# Altium PCB Power_Pcb.PcbDoc
Units mil, origin at the board's own origin, x right, y up, seen from the top; angles counter-clockwise.
Board outline 1870 x 3940 mil, 2 copper layers (Top Layer, Bottom Layer); 15 components, 11 nets, 49 pads, 0 vias.
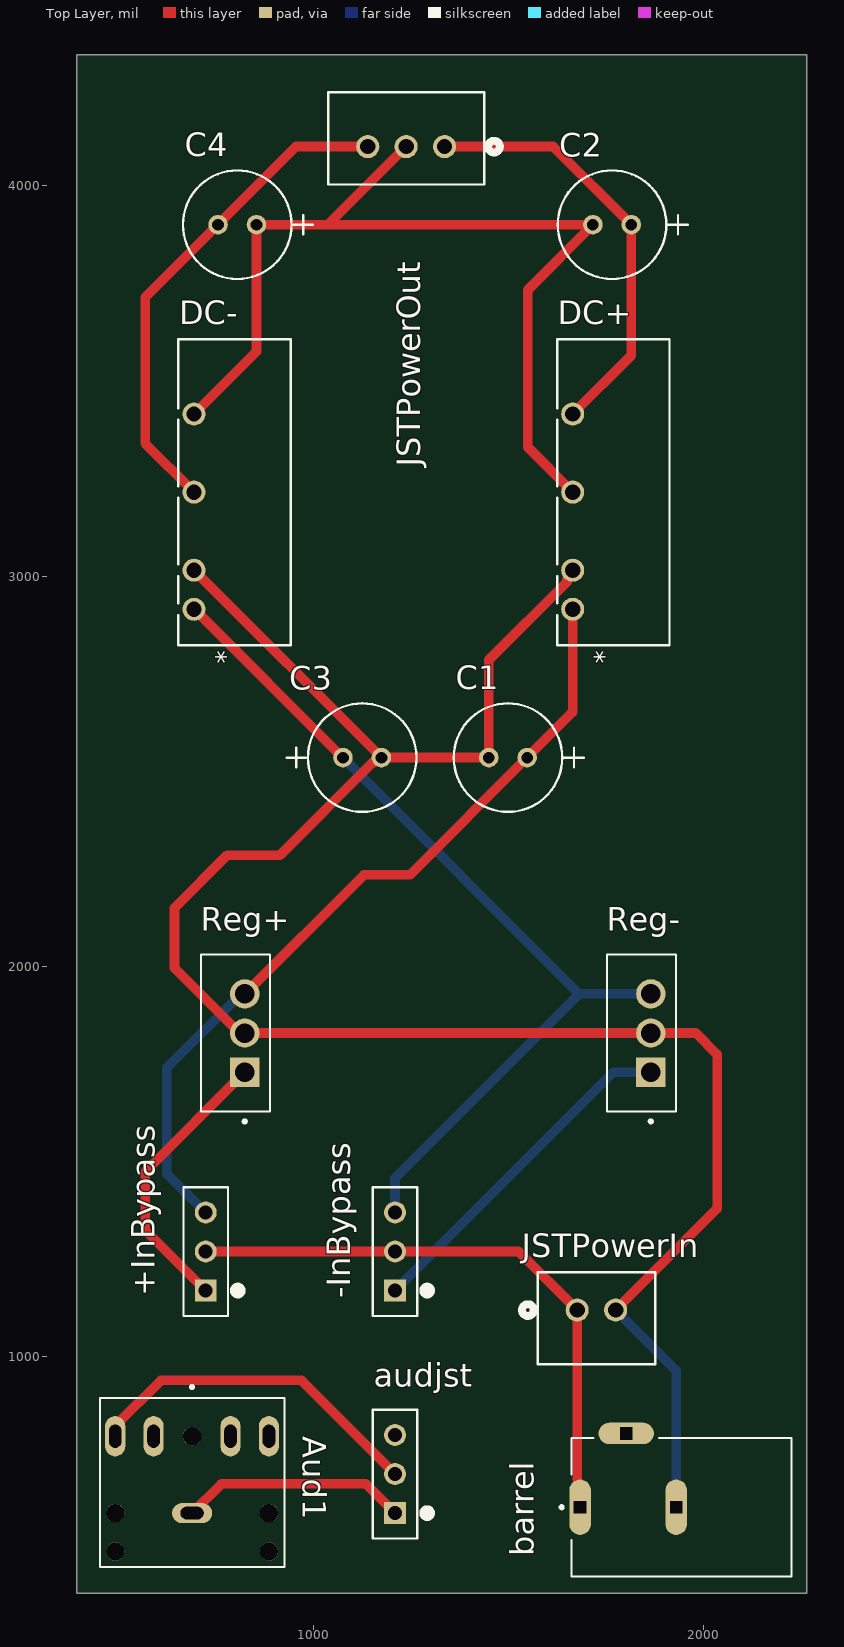
[diagram p0: Top Layer view]
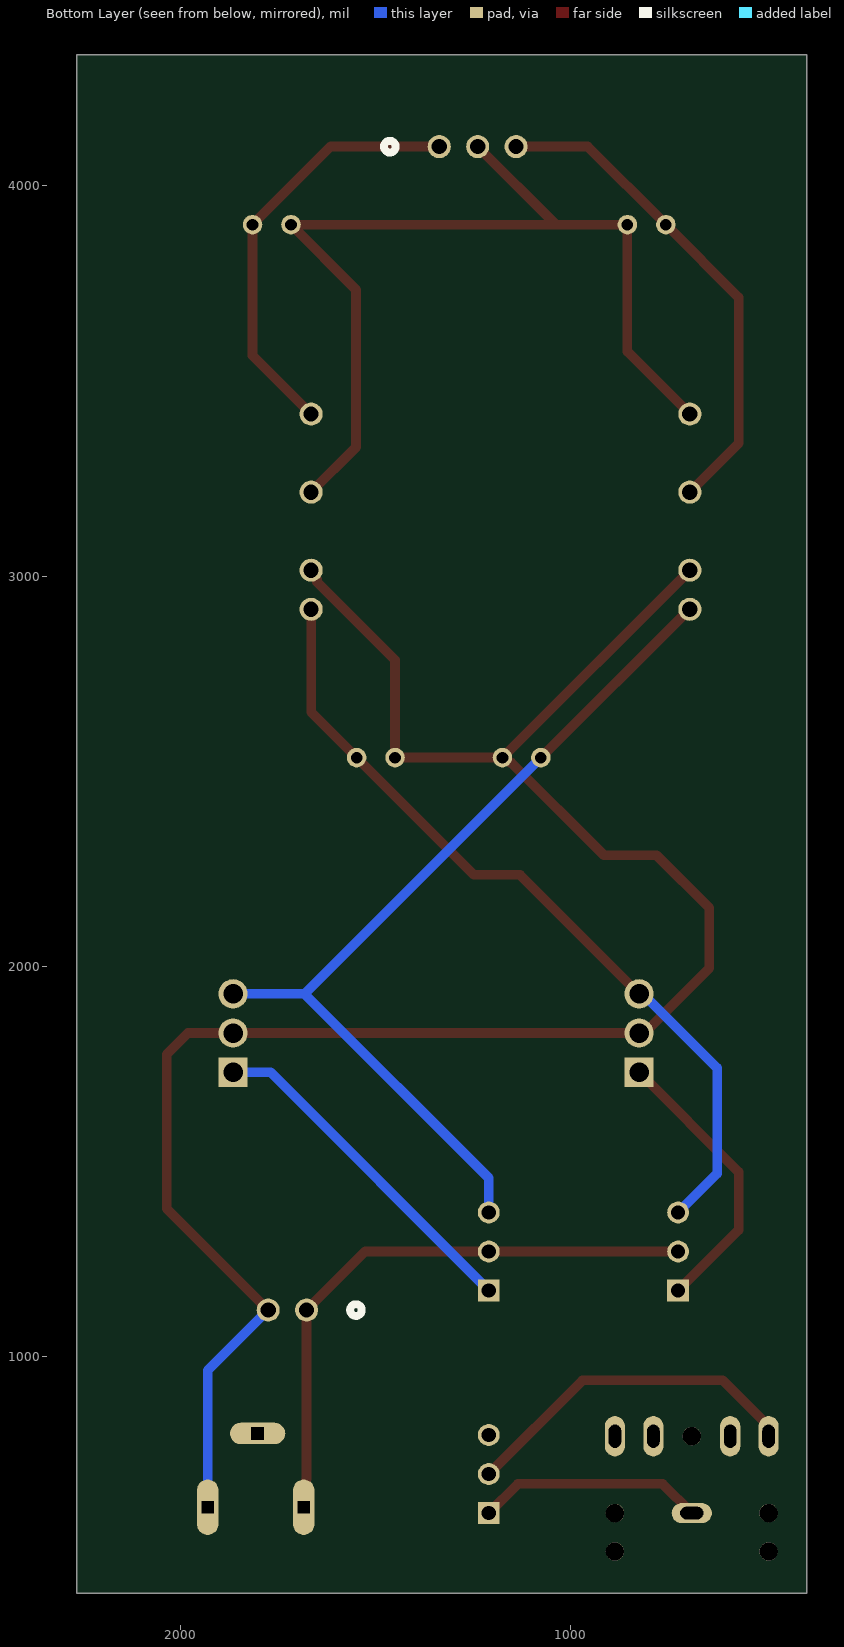
[diagram p1: Bottom Layer view, seen from below]
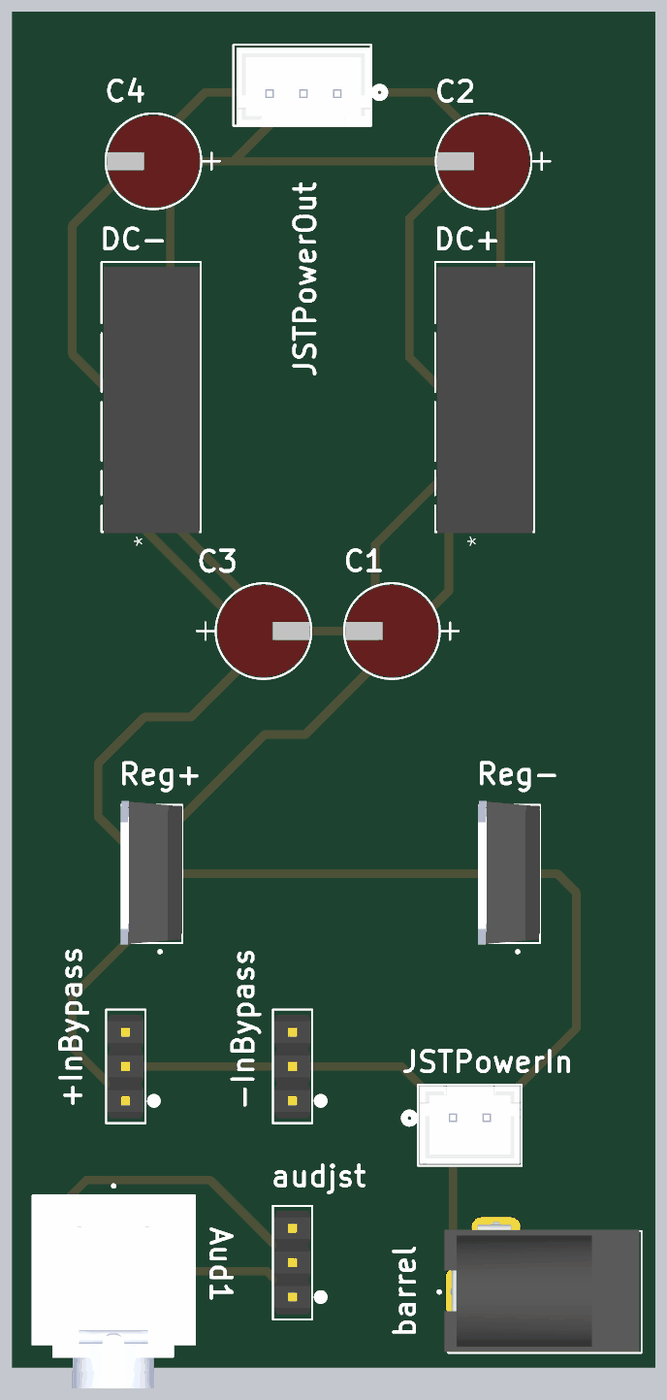
[diagram p2: 3D render of the assembled board from above, using the file's embedded part models]

## Layer stack, top to bottom
Top Solder: solder mask 0.4, Solder Resist, Dk 3.5
Top Layer: signal copper 1.4
Dielectric 1: dielectric 12.6, FR-4, Dk 4.8
Bottom Layer: signal copper 1.4
Bottom Solder: solder mask 0.4, Solder Resist, Dk 3.5

## Board outline
395,395 395,4335 2265,4335 2265,395

## Design rules (kind name [scope] priority, off if disabled: settings)
Clearance [All] p1: gap=10 ignorepadtopadclearanceinfootprint=FALSE ismatrix=TRUE
PolygonConnect [All] p1: connectstyle=Relief reliefconductorwidth=10 reliefentries=4 polygonreliefangle="90 Angle" airgapwidth=10
RoutingVias [All] p1: holewidth=28 width=50 viastyle="Through Hole" minholewidth=28 minwidth=50 maxholewidth=28 maxwidth=50
SolderMaskExpansion [All] p1: expansion=4 istentingtop=FALSE
Width [All] p1: maxlimit=25 minlimit=10 preferedwidth=10 minimp=50.000000 maximp=50.000000 favimp=50.000000
30 further rules are at their usual default settings.

## Components (designator, comment, footprint, x,y, rotation, side; value= is the part's Value field where it differs from the comment)
+InBypass "3pinHeaders" CONN_M20-99903XX_HRW 725,1170 r90 top
-InBypass "3pinHeaders" CONN_M20-99903XX_HRW 1210,1170 r90 top
Aud1 "Audioport" CUI_SJ1-3525N 690,600 r0 top
audjst "3pinHeaders" CONN_M20-99903XX_HRW 1210,600 r90 top
barrel "54-00167" TENSILITY_54-00167 1930,615 r90 top
C1 "capacitor" CAP_YX_6P3X11_RUB 1548.43,2535 r180 top
C2 "capacitor" CAP_YX_6P3X11_RUB 1815,3900 r180 top
C3 "capacitor" CAP_YX_6P3X11_RUB 1076.57,2535 r0 top
C4 "capacitor" CAP_YX_6P3X11_RUB 855,3900 r180 top
DC+ "dc-dc" B_S-2WR2_MNS 1665,2915 r90 top
DC- "dc-dc" B_S-2WR2_MNS 695,2915 r90 top
JSTPowerIn "2pinJST" CONN_B2B-XH-A_JST 1676.57,1120 r180 top
JSTPowerOut "3pinJST" CONN_B3B-XH-A_JST 1336.85,4100 r0 top
Reg+ "+10vregulator" TO255P1020X450X1968-3B 825,1829.61 r90 top
Reg- "+10vregulator" TO255P1020X450X1968-3B 1865,1829.61 r90 top

## Footprints (in the part's own frame and the unit in brackets; to place one, negate y for a bottom-side part, rotate by r counter-clockwise, add the part's x,y. Pads: shape width x height; smd on the part's side, far side on the other; paste and mask are expansions set on the pad)
B_S-2WR2_MNS [mil]
  round 59 / inner round 60 / far side round 59 hole 39 paste-99999 mask+0: 1(0,0) 2(100,0) 4(300,0) 6(500,0)
  silkscreen extent -92,-248 692,40, body extent -95,-244 679,34, height 400
CAP_YX_6P3X11_RUB [mil]
  round 50 / inner round 60 / far side round 50 hole 30 paste-99999 mask+0: 1(0,0) 2(98.43,0)
  silkscreen extent -145,-139 188,139, body extent -85,-134 184,134, height 493
CONN_B2B-XH-A_JST [mil]
  round 59 / inner round 60 / far side round 59 hole 39 paste-99999 mask+0: 1(0,0) 2(-98.43,0)
  silkscreen extent -200,-97 141,139, body extent -195,-93 96,133, height 276
CONN_B3B-XH-A_JST [mil]
  round 59 / inner round 60 / far side round 59 hole 39 paste-99999 mask+0: 1(0,0) 2(-98.43,0) 3(-196.85,0)
  silkscreen extent -298,-97 142,139, body extent -290,-96 100,130, height 276
CONN_M20-99903XX_HRW [mil]
  rect 56x56 / inner round 60 / far side rect 56x56 hole 36 paste-99999 mask+0: 1(0,0)
  round 56 / inner round 60 / far side round 56 hole 36 paste-99999 mask+0: 2(100,0) 3(200,0)
  silkscreen extent -65,-92 265,57, body extent -50,-52 250,52, height 344
CUI_SJ1-3525N [mm]
  oval 2.616x1.308 hole 0.8 slot 1.5 at 0 deg: 1(0,0)
  oval 1.308x2.616 hole 0.8 slot 1.5 at 90 deg: 2(5,5) 3(-5,5) 10(2.5,5) 11(-2.5,5)
  round 1.2 hole 1.2 unplated: ""(-5,-2.5) ""(-5,0) ""(0,5) ""(5,-2.5) ""(5,0)
  silkscreen extent -6,-3.5 6,8.3, body extent -6.03,-6.77 5.97,7.53, height 5.55
TENSILITY_54-00167 [mm]
  oval 3.6x1.4 hole 0.8 square mask+0.05: A(0,6.25) B(0,0)
  oval 1.4x3.6 hole 0.8 square mask+0.05: C(4.8,3.25)
  silkscreen extent -4.5,-7.5 4.5,7.55, body extent -4.43,-7.33 4.97,7.07, height 11.36
TO255P1020X450X1968-3B [mm]
  rect 1.905x1.905 / inner round 1.905 / far side rect 1.905x1.905 hole 1.27: 1(-2.55,0)
  round 1.905 hole 1.27: 2(0,0) 3(2.55,0)
  silkscreen extent -5.85,-1.65 5.1,2.86, body extent -5.23,-1.65 5.37,2.92, height 24.76

## Part data
+InBypass -InBypass audjst: "No Description Available", Mfr_Name=Harwin, RefDes=RefDes, TYPE=Type
Aud1: "3.5 mm, Stereo, Right Angle, Through Hole, 3 Conductors, 2 Internal Switches, Audio Jack Connector", Package=None, Check_prices=https://www.snapeda.com/parts/SJ1-3525N/CUI+Devices/view-part/?ref=eda, CUI_purchase_URL=https://www.cuidevices.com/product/interconnect/connectors/audio-connectors/jacks/sj1-3525n?utm_source=snapeda.com&utm_medium=referral&utm_campaign=snapedaBOM, MF="CUI Devices", MP=SJ1-3525N, SnapEDA_Link=https://www.snapeda.com/parts/SJ1-3525N/CUI+Devices/view-part/?ref=snap
barrel: "Connector, dc jack 5.5x2.5 mm, PCB mount, 90 degrees, nickel plated, PBT, thru hole", Package=None, Availability="In Stock", Check_prices=https://www.snapeda.com/parts/54-00167/Tensility+International+Corp/view-part/?ref=eda, MF="Tensility International Corp", MP=54-00167, Price=None, Purchase-URL=https://pricing.snapeda.com/search?q=54-00167&ref=eda, SnapEDA_Link=https://www.snapeda.com/parts/54-00167/Tensility+International+Corp/view-part/?ref=snap
C1 C2 C3 C4: "No Description Available", Mfr_Name=Rubycon
DC+ DC-: "No Description Available", Mfr_Name=MORNSUN, RefDes=RefDes, TYPE="DC DC Converters"
JSTPowerIn JSTPowerOut: "No Description Available", Mfr_Name=JST, RefDes=RefDes, TYPE=Type
Reg+ Reg-: "Linear Voltage Regulator IC Positive Fixed 1 Output 1.5A TO-220AB", Package="TO-220-3 STMicroelectronics", Check_prices=https://www.snapeda.com/parts/L7810CV/STMicroelectronics/view-part/?ref=eda, MF=STMicroelectronics, MP=L7810CV, SnapEDA_Link=https://www.snapeda.com/parts/L7810CV/STMicroelectronics/view-part/?ref=snap

## Nets (pads, with @x,y where several pads share a name; then routed paths per layer and width w, separated by ;. In a path a pad name is that pad's centre, name@x,y a point inside that pad or via, vN(x,y) a via of type N, cw(c..) or ccw(c..) an arc to the next point about the centre after c; other vN are vias at no path point)
12out: C2.1 DC+.6 JSTPowerOut.1 | length 1108.1
  Top Layer w25: JSTPowerOut.1 1615,4100 C2.1 1815,3565 DC+.6
-12: C4.2 DC-.4 JSTPowerOut.3 | length 1280.3
  Top Layer w25: DC-.4 570,3340 570,3713.43 C4.2 956.57,4100 JSTPowerOut.3
GND: C2.2 C4.1 DC+.4 DC-.6 JSTPowerOut.2 | length 2497.3
  Top Layer w25: DC-.6 855,3575 C4.1 1038.43,3900 ; JSTPowerOut.2 1038.43,3900 ; DC+.4 1550,3330 1550,3733.43 C2.2 1038.43,3900
Net+InBypass_1: +InBypass.1 Reg+.1 | length 729
  Top Layer w25: +InBypass.1 570,1325 570,1474.21 Reg+.1
Net+InBypass_2: +InBypass.2 -InBypass.2 barrel.A JSTPowerIn.1 | length 1521.8
  Top Layer w25: +InBypass.2 -InBypass.2 1526.57,1270 JSTPowerIn.1 1676.57,686.97 1678.17,685.37 1678.17,620.76 barrel.A
Net+InBypass_3: +InBypass.3 C1.1 DC+.1 Reg+.3 | length 2092.4
  Top Layer w25: Reg+.3 1129.89,2234.89 1248.32,2234.89 C1.1 1665,2651.57 DC+.1
  Bottom Layer w25: +InBypass.3 625,1470 625,1740 815,1930 Reg+.3
Net-InBypass_1: -InBypass.1 Reg-.1 | length 886.6
  Bottom Layer w25: -InBypass.1 1769.21,1729.21 Reg-.1
Net-InBypass_3: -InBypass.3 C3.1 DC-.1 Reg-.3 | length 2324.9
  Top Layer w25: DC-.1 695.79,2915 1075.79,2535 C3.1
  Bottom Layer w25: C3.1 1681.57,1930 1210,1458.43 -InBypass.3 ; 1690,1930 Reg-.3
NetAud1_1: Aud1.1 audjst.1 | length 582.1
  Top Layer w25: Aud1.1 765,675 1135,675 audjst.1
NetAud1_3: Aud1.3 audjst.2 | length 890.6
  Top Layer w25: Aud1.3 493.15,822.6 610.55,940 970,940 audjst.2
vGND: barrel.B C1.2 C3.2 DC+.2 DC-.2 JSTPowerIn.2 Reg+.2 Reg-.2 | length 5179.7
  Top Layer w25: DC-.2 C3.2 ; DC+.2 1665,3005.8 1650.12,2990.92 1650.12,2985.12 1450,2785 C1.2 C3.2 ; JSTPowerIn.2 2035,1380 2035,1775 1980.39,1829.61 Reg-.2 Reg+.2 811.47,1829.61 645,1996.08 645,2150 780,2285 915,2285 1152.5,2522.5 1155.74,2522.5 1168.24,2535 C3.2
  Bottom Layer w25: JSTPowerIn.2 1930,965 barrel.B
pads on no net: Aud1. Aud1.2 Aud1.10 Aud1.11 audjst.3 barrel.C

## Text inside footprints (layer, text, board x,y; h text height)
Aud1: Mechanical 13 "PCB EDGE" at 965.59,472.05 h32
DC+: Top Overlay "*" at 1770,2775 h50 r90; Mechanical 13 "*" at 1690,2825.5 h50 r90
DC-: Top Overlay "*" at 800,2775 h50 r90; Mechanical 13 "*" at 720,2825.5 h50 r90